# EAGLE board stecker_umrisse_dimmer_geh (EAGLE 4.16)

Size 47.43 x 44.38 mm. Coordinates in mm from the lower left corner, seen from the top.
Outline: 10.62,44.38 36.96,44.38
Outline: 47.42,13.9 47.43,31.75
Outline: 12.95,0 34.75,0
Outline: 12.95,0 arc-44 0,14.19 0,31.58 arc-36 10.61,44.39
Outline: 36.98,44.38 arc-38 47.43,31.76
Outline: 47.42,13.91 arc-44 34.75,0
Copper layers (1*16): Top 0.035mm / dielectric 1.5mm / Bottom 0.035mm
Design rules "default": minimum track width 10mil, minimum drill 24mil, track to track 8mil, track to pad 8mil, pad to pad 8mil, via to via 8mil, smd to smd 8mil, copper to edge 40mil, drill to drill 8mil, minimum pad ring 10mil, minimum via ring 8mil, stop-mask expansion 4mil, vias tented up to drill 0mil, thermal gap 10mil

## Footprints (pad centres in the part's own frame; a part is rotated, then mirrored left to right if it is on the bottom)
G5Q_1_EU = drill 1.3 round: 11 1.27,-3.81; 12 6.35,3.81; 14 8.89,-3.81; A1 -8.89,-3.81; A2 -8.89,3.81
12CROSS = drill 1.016 octagon: 1 -3.81,-1.27; 2 -3.81,1.27; 3 -1.27,-1.27; 4 -1.27,1.27; 5 1.27,-1.27; 6 1.27,1.27; 7 3.81,-1.27; 8 3.81,1.27; 9 1.27,-3.81; 10 -1.27,-3.81; 11 1.27,3.81; 12 -1.27,3.81
W237-132 = drill 1.194 long: 1 -2.54,-0.635; 2 2.54,-0.635
2X03 = drill 1.016 octagon: 1 -2.54,-1.27; 2 -2.54,1.27; 3 0,-1.27; 4 0,1.27; 5 2.54,-1.27; 6 2.54,1.27
BUSKLEMME243-724 = drill 1.3 long: 1 -2.875,0; 2 2.875,0

## Placement (x,y rotation side)
E$1  [G5Q_1_EU]  34.06,27.92 90 top
E$2  [G5Q_1_EU]  13.43,27.97 90 top
E$3  [12CROSS]  23.85,22.85 0 top
E$4  [W237-132]  51.7,4.8 0 top
E$5  [2X03]  32.72,4.33 90 top
E$6  [2X03]  14.82,4.33 90 top
E$7  [BUSKLEMME243-724]  23.85,4.18 0 top

## Library data of the parts
E$1 E$2 = freebus_relay
E$3 E$5 E$6 = pinhead
E$4 = con-wago-508
E$7 = con-wago

## Text on the board
tValues: Bus